# Altium PCB ETRX_Shield_gran.PcbDoc (part 1 of 2)
Units mm, origin at the board's own origin, x right, y up, seen from the top; angles counter-clockwise.
Board outline 80 x 60 mm, 4 copper layers (Top Layer, GND, PWR, Bottom Layer), stack 1.506 mm thick; 134 components, 122 nets, 503 pads, 34 vias.
Unrouted connection lines stored in the file: 347.
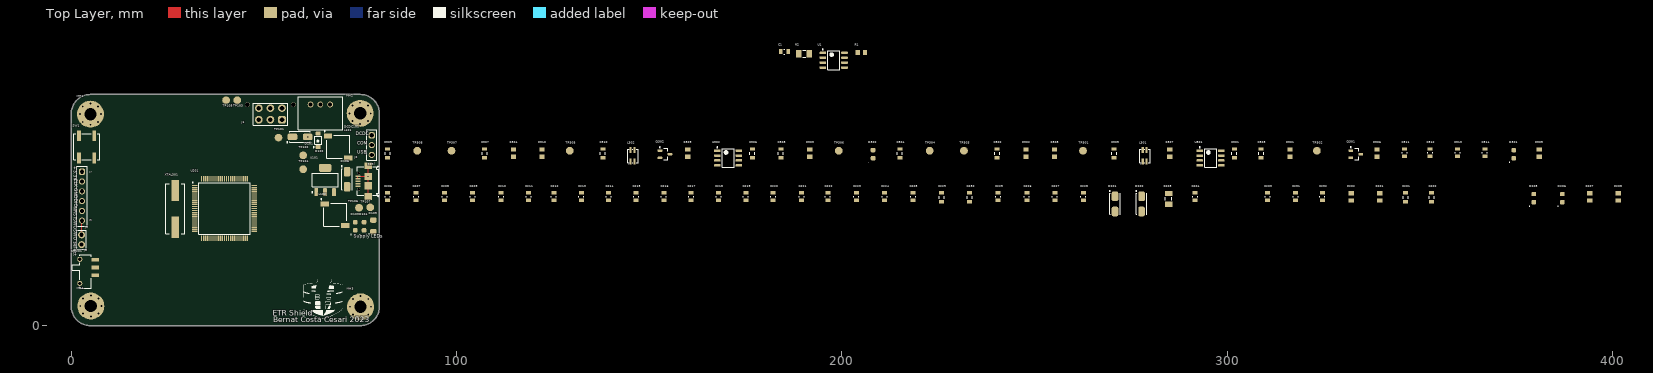
[diagram p0: Top Layer view]
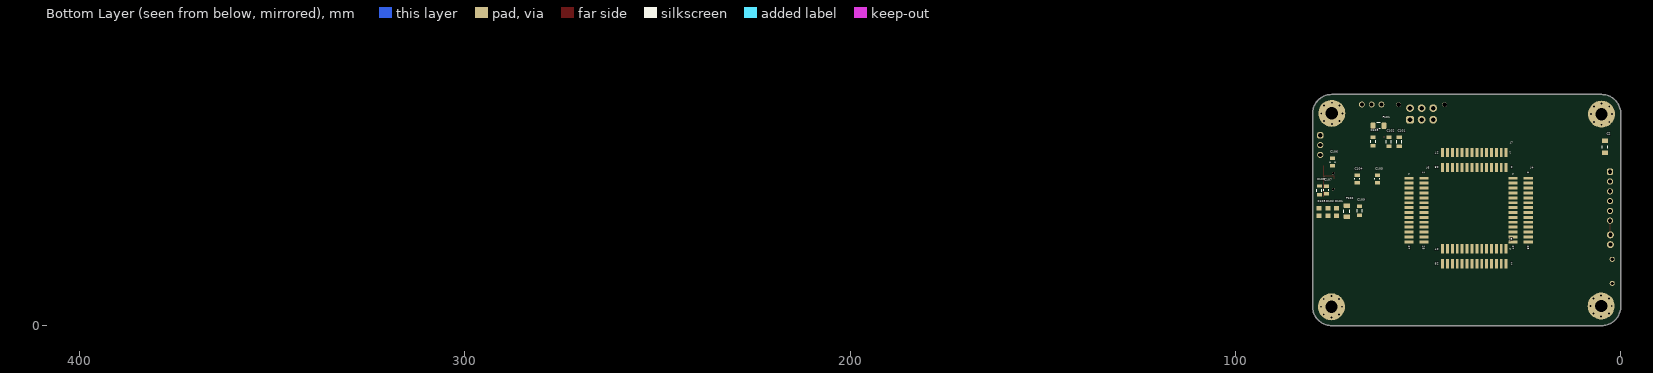
[diagram p1: Bottom Layer view, seen from below]

## Layer stack, top to bottom
Top Solder: solder mask 0.01, Solder Resist, Dk 3.5
Top Layer: signal copper 0.035
Dielectric 2: prepreg 0.1, PP-006, Dk 4.1
GND: signal copper 0.018
Dielectric 4: prepreg 0.1, PP-006, Dk 4.1
Dielectric 1: dielectric 1, FR-4, Dk 4.8
Dielectric 5: prepreg 0.1, PP-006, Dk 4.1
PWR: signal copper 0.018
Dielectric 3: prepreg 0.1, PP-006, Dk 4.1
Bottom Layer: signal copper 0.035
Bottom Solder: solder mask 0.01, Solder Resist, Dk 3.5

## Board outline
5,0 cw(c5,5) 0,5 0,55 cw(c5,55) 5,60 75,60 cw(c75,55) 80,55 80,5 cw(c75,5) 75,0

## Design rules (kind name [scope] priority, off if disabled: settings)
Clearance [All] p1: gap=0.2 ignorepadtopadclearanceinfootprint=FALSE
DiffPairsRouting [All] p1: maxlimit=0.254 minlimit=0.254 mostfreqgap=0.254 toplayer_minwidth=0.381 toplayer_maxwidth=0.381 toplayer_prefwidth=0.381 midlayer1_minwidth=0.381 midlayer1_maxwidth=0.381 midlayer1_prefwidth=0.381 midlayer2_minwidth=0.381 midlayer2_maxwidth=0.381 midlayer2_prefwidth=0.381 bottomlayer_minwidth=0.381 bottomlayer_maxwidth=0.381 bottomlayer_prefwidth=0.381 maxuncoupledlength=12.7
HoleSize [All] p1: absolutevalues=TRUE maxlimit=3 minlimit=0.2 maxpercent=80.000 minpercent=20.000
HoleToHoleClearance [All] p1: gap=0.2 allowstackedmicrovias=TRUE
MinimumSolderMaskSliver [All] p1: minsoldermaskwidth=0.2
PlaneClearance [All] p1: clearance=0.5
PlaneConnect [All] p1: planeconnectstyle=Direct reliefexpansion=0.508 reliefentries=4 reliefconductorwidth=0.254 reliefairgap=0.254
PolygonConnect [All] p1: connectstyle=Direct reliefconductorwidth=0.254 reliefentries=4 polygonreliefangle="90 Angle" airgapwidth=0.254
RoutingVias [All] p1: holewidth=0.2 width=0.3 viastyle="Through Hole" minholewidth=0.2 minwidth=0.3 maxholewidth=1.8 maxwidth=2
SilkToSilkClearance [All] p1: silktosilkclearance=0.2
SilkToSolderMaskClearance [IsPad] p1: minsilkscreentomaskgap=0.2 clearancetoexposedcopper=TRUE
SolderMaskExpansion [All] p1: expansion=0.1 istentingtop=FALSE
UnRoutedNet [All] p1: checkbadconnections=TRUE
Width [All] p1: maxlimit=1 minlimit=0.2 preferedwidth=0.3 midlayer1_minwidth=0.254 midlayer1_maxwidth=0.254 midlayer1_prefwidth=0.254 midlayer2_minwidth=0.254 midlayer2_maxwidth=0.254 midlayer2_prefwidth=0.254 minimp=50.000000 maximp=50.000000 favimp=50.000000
21 further rules are at their usual default settings.

## Classes and differential pairs
component class ETRX_Shield: C1 C2 J1 J2 J3 J4 J5 J6 J7 J8 MH1 MH2 MH3 MH4 R1 R2 SW1 U1
component class "[3] CAN": C301 C302 C303 C304 C305 C306 C307 C308 C309 C310 C311 C312 C313 C314 D301 D302 L301 L302 Q301 Q302 R301 R302 R303 R304 R305 R306 R307 R308 R309 R310 TP301 TP302 TP303 TP304 TP305 TP306 TP307 TP308 U301 U302
component class "[2] MCU": C201 C202 C203 C204 C205 C206 C207 C208 C209 C210 C211 C212 C213 C214 C215 C216 C217 C218 C219 C220 C221 C222 C223 C224 C225 C226 C227 C228 C229 C230 C231 C232 D201 D202 D205 D206 R201 R202 R203 R207 R208 SW201 U201 XTAL301
component class "[1] Supply": C101 C102 C103 C104 C105 C106 C107 C108 C109 D101 D102 D103 D104 D105 D106 DCDC101 F101 F102 J101 L101 L102 R101 R102 R103 TP101 TP102 TP103 TP104 TP105 TP106 TP107 U101
differential pair USB_OTG: +USB_OTG_H -USB_OTG_L
differential pair CAN2: +CAN2_H -CAN2_L
differential pair CAN1: +CAN1_H -CAN1_L

## Components (designator, comment, footprint, x,y, rotation, side; value= is the part's Value field where it differs from the comment)
C1 "885012207098" C0805FNPC-R 185.1,71.1 r0 top
C2 "885012208058" C1206FNPC-RW 4.1,46.4 r90 bottom
C101 "10uF" C0805FNPC-W 57.5,47.75 r90 bottom
C102 "10uF" C0805FNPC-W 60.2,47.75 r90 bottom
C103 "10uF" C0805FNPC-W 64.3,47.8 r90 bottom
C104 "885012107014" C0805FNPC-R 68.4,38.1 r90 bottom
C105 "885012107014" C0805FNPC-R 63.2,38.1 r90 bottom
C106 "885012207098" C0805FNPC-R 74.8,42.45 r270 bottom
C107 "885012207103" C0805FNPC-R 76.4,35.2 r270 bottom
C108 "10uF" C0805FNPC-W 78.2,35.1 r270 bottom
C109 "10uF" C0805FNPC-W 67.8,29.8 r90 bottom
C201 "2.2uF" C0805FNPC-W 346.299,33.3 r90 top
C202 "2.2uF" C0805FNPC-W 353.099,33.3 r90 top
C203 "885012007052" C0805FNPC-R 310.499,33.5 r90 top
C204 "885012007052" C0805FNPC-R 291.699,33.5 r90 top
C205 "885012207098" C0805FNPC-R 218.5,33.5 r90 top
C206 "885012207098" C0805FNPC-R 82.1,33.5 r90 top
C207 "885012207098" C0805FNPC-R 89.5,33.5 r90 top
C208 "885012207098" C0805FNPC-R 96.9,33.5 r90 top
C209 "885012207098" C0805FNPC-R 104.2,33.5 r90 top
C210 "885012207098" C0805FNPC-R 111.6,33.5 r90 top
C211 "885012207098" C0805FNPC-R 118.7,33.5 r90 top
C212 "885012207098" C0805FNPC-R 125.3,33.5 r90 top
C213 "885012207098" C0805FNPC-R 132.4,33.5 r90 top
C214 "885012207098" C0805FNPC-R 139.5,33.5 r90 top
C215 "885012207098" C0805FNPC-R 146.6,33.5 r90 top
C216 "885012207098" C0805FNPC-R 153.8,33.5 r90 top
C217 "885012207098" C0805FNPC-R 160.9,33.5 r90 top
C218 "885012207098" C0805FNPC-R 168,33.5 r90 top
C219 "885012207098" C0805FNPC-R 175.1,33.5 r90 top
C220 "885012207098" C0805FNPC-R 182.2,33.5 r90 top
C221 "885012207098" C0805FNPC-R 189.6,33.5 r90 top
C222 "885012207098" C0805FNPC-R 196.4,33.5 r90 top
C223 "885012207098" C0805FNPC-R 203.8,33.5 r90 top
C224 "885012207098" C0805FNPC-R 211.1,33.5 r90 top
C225 "885012207103" C0805FNPC-R 240.6,33.5 r90 top
C226 "885012207098" C0805FNPC-R 248,33.5 r90 top
C227 "885012207103" C0805FNPC-R 255.299,33.5 r90 top
C228 "885012207098" C0805FNPC-R 262.699,33.5 r90 top
C229 "2.2uF" C0805FNPC-W 225.9,33.3 r90 top
C230 "2.2uF" C0805FNPC-W 233.2,33.3 r90 top
C231 "885012207098" C0805FNPC-R 317.799,33.5 r90 top
C232 "885012207103" C0805FNPC-R 324.699,33.5 r90 top
C301 "885012007057" C0805FNPC-W 301.899,44.7 r90 top
C302 "885012007057" C0805FNPC-W 240.3,44.7 r90 top
C303 "885012007057" C0805FNPC-W 308.799,44.7 r90 top
C304 "885012007057" C0805FNPC-W 215.1,44.7 r90 top
C305 "885012007057" C0805FNPC-W 270.699,44.7 r90 top
C306 "885012007057" C0805FNPC-W 176.8,44.7 r90 top
C307 "885012007057" C0805FNPC-W 107.3,44.7 r90 top
C308 "885012007057" C0805FNPC-W 184.2,44.7 r90 top
C309 "885012007057" C0805FNPC-W 82.1,44.7 r90 top
C310 "885012007057" C0805FNPC-W 138,44.7 r90 top
C311 "885012207098" C0805FNPC-R 346.099,44.9 r90 top
C312 "885012207098" C0805FNPC-R 352.699,44.9 r90 top
C313 "885012207098" C0805FNPC-R 359.799,44.9 r90 top
C314 "885012207098" C0805FNPC-R 366.899,44.9 r90 top
D101 "824501261" DTVS-DO-214AC 59.4,49 r180 top
D102 "MBR0530" DSC-SOD123 64.1,48.1 r90 top
D103 "150080GS75000" LED_0805_WE 73.7,25.8 r90 top
D104 "150080GS75000" LED_0805_WE 76,25.8 r90 top
D105 "150120BS75000" LED_1206_WE 78.4,25.9 r90 top
D106 "824501131" DTVS-DO-214AC 71.6,38 r90 top
D201 "824501600" DTVS-DO-214AC 270.899,31.6 r90 top
D202 "824501600" DTVS-DO-214AC 277.799,31.6 r90 top
D205 "150080RS75000" LED_0805_WE 379.599,33.1 r90 top
D206 "150080RS75000" LED_0805_WE 386.999,33.1 r90 top
D301 "150080YS75000" LED_0805_WE 374.399,44.5 r90 top
D302 "150080YS75000" LED_0805_WE 208.1,44.5 r90 top
DCDC101 "173010542" DCDC_Magi3c 64.66,57.4 r0 top
F101 "0437001.WRA" Fuse_1206 62.875,51.9 r180 bottom
F102 "0437001.WRA" Fuse_1206 71.1,29.7 r90 bottom
J1 "Molex Micro Fit 2x3" J_MicroFit_2x3_V 51.7,55.4 r0 top
J2 "629105136821" 629105136821 77.1,37.5 r90 top
J3 "6 pin header" 61300611121 2.8,33.59 r270 top
J4 "62132821021" 62132821021 26,30 r270 bottom locked
J5 "62132821021" 62132821021 38,18 r0 bottom locked
J6 "62132821021" 62132821021 53,30 r270 bottom locked
J7 "62132821021" 62132821021 38,43 r0 bottom locked
J8 "61300211121" J_Pinheader_1x2 2.7,22.3 r90 top
J101 "3 pin header" J_PINHEADER_1x3 78,46.86 r270 top
L101 "47uH" L_47u-490mA_CF 69.3,46.4 r0 top
L102 "47uH" L_47u-490mA_CF 68.5,28.8 r0 top
L301 "DLW32SH510XF2" "CMC-51uH Choke" 278.599,44.1 r90 top
L302 "DLW32SH510XF2" "CMC-51uH Choke" 145.7,44.1 r90 top
MH1 "Mounting_Hole_M3" Mounting_Hole_M3 5,54.9 r0 top
MH2 "Mounting_Hole_M3" Mounting_Hole_M3 75,55.1 r0 top
MH3 "Mounting_Hole_M3" Mounting_Hole_M3 75.1,4.9 r0 top
MH4 "Mounting_Hole_M3" Mounting_Hole_M3 5.1,5.1 r0 top
Q301 "BC817-25LT1G" TRT-NPN-0.5/45-SOT23 333.399,44.5 r0 top
Q302 "BC817-25LT1G" TRT-NPN-0.5/45-SOT23 154.1,44.5 r0 top
R1 "549kR" R0805FTK 205.1,70.9 r0 top
R2 "CR1206AFX-6802EAS" R1206FTK-W 190.2,70.6 r0 top
R101 "CR0805-FX-4700GLF" R0805FTK 73.8,29.5 r270 bottom
R102 "CR0805-FX-1000ELF" R0805FTK 76,29.5 r270 bottom
R103 "CR0805-FX-4700GLF" R0805FTK 78.3,29.5 r90 bottom
R201 "620kR" R0805FTK 339.599,33.4 r90 top
R202 "430kR" R0805FTK 332.199,33.4 r90 top
R203 "CRCW12061K60FKEA" R1206FTK-W 284.799,32.9 r90 top
R207 "CR0805-FX-1000ELF" R0805FTK 394.099,33.4 r90 top
R208 "CR0805-FX-1000ELF" R0805FTK 401.499,33.4 r90 top
R301 "R60-0805FTN" R0805FTK 316.299,44.8 r90 top value=60R
R302 "R60-0805FTN" R0805FTK 247.8,44.8 r90 top value=60R
R303 "R60-0805FTN" R0805FTK 191.7,44.8 r90 top value=60R
R304 "R60-0805FTN" R0805FTK 114.8,44.8 r90 top value=60R
R305 "CR0805-FX-4700GLF" R0805FTK 380.999,44.8 r90 top
R306 "47k" R0805FTK 338.899,44.8 r90 top
R307 "22kR" R0805FTK 285.099,44.8 r90 top
R308 "CR0805-FX-4700GLF" R0805FTK 255.199,44.8 r90 top
R309 "47k" R0805FTK 160,44.8 r90 top
R310 "22kR" R0805FTK 122.2,44.8 r90 top
SW1 "430773034825" WS-TASV_L6W6H3.4_4307x30348xx 4,46.4 r270 top
SW201 "450405020524" 450405020524 3.726,14.1 r270 top
TP101 "TestPoint" TestPoint 53.8,48.8 r90 top
TP102 "TestPoint" TestPoint 60.2,44.2 r90 top
TP103 "TestPoint" TestPoint 43.1,58.5 r90 top
TP104 "TestPoint" TestPoint 60.2,40.6 r90 top
TP105 "TestPoint" TestPoint 40.2,58.5 r90 top
TP106 "TestPoint" TestPoint 74.7,30.6 r90 top
TP107 "TestPoint" TestPoint 77.6,30.7 r90 top
TP301 "TestPoint" TestPoint 262.599,45.4 r90 top
TP302 "TestPoint" TestPoint 323.299,45.4 r90 top
TP303 "TestPoint" TestPoint 231.7,45.4 r90 top
TP304 "TestPoint" TestPoint 222.8,45.4 r90 top
TP305 "TestPoint" TestPoint 129.4,45.4 r90 top
TP306 "TestPoint" TestPoint 199.2,45.4 r90 top
TP307 "TestPoint" TestPoint 98.7,45.4 r90 top
TP308 "TestPoint" TestPoint 89.8,45.4 r90 top
U1 "24AA024H-I/SN" "SOIC, 8-Leads 1,27mm" 197.9,68.9 r0 top
U101 "LM1117IMP-3.3/NOPB" LDO_10V-0.8/3V3-SOT223 65.9,37.8 r90 top
U201 "STM32F777VIT6" QFP50P1600X1600X160-100N 39.8,30.4 r0 top locked
U301 "MCP2551 I/SN" "SOIC, 8-Leads 1,27mm" 295.699,43.5 r0 top
U302 "MCP2551 I/SN" "SOIC, 8-Leads 1,27mm" 170.5,43.5 r0 top
XTAL301 "830028710" XTAL20M_SMD 27,30.3 r90 top

## Footprints (in the part's own frame and the unit in brackets; to place one, negate y for a bottom-side part, rotate by r counter-clockwise, add the part's x,y. Pads: shape width x height; smd on the part's side, far side on the other; paste and mask are expansions set on the pad)
61300611121 [mm] "Pin Header, pitch 2.54 mm, THT, Vertical, single row, 6p"
  rrect50% 1.6x1.6 hole 1.1: 1(-6.35,0)
  round 1.6 hole 1.1: 2(-3.81,0) 3(-1.27,0) 4(1.27,0) 5(3.81,0) 6(6.35,0)
  silkscreen extent -7.77,-1.35 7.77,1.35, body extent -7.62,-1.27 7.62,1.27, height 8.57
62132821021 [mm] "Pin Header, pitch 1.27 mm, SMD, Vertical, dual row, 28p"
  rect 0.75x2.4 smd: 1(-8.255,-1.95) 2(-8.255,1.95) 3(-6.985,-1.95) 4(-6.985,1.95) 5(-5.715,-1.95) 6(-5.715,1.95) 7(-4.445,-1.95) 8(-4.445,1.95) 9(-3.175,-1.95) 10(-3.175,1.95) 11(-1.905,-1.95) 12(-1.905,1.95) 13(-0.635,-1.95) 14(-0.635,1.95) 15(0.635,-1.95) 16(0.635,1.95) 17(1.905,-1.95) 18(1.905,1.95) 19(3.175,-1.95) 20(3.175,1.95) 21(4.445,-1.95) 22(4.445,1.95) 23(5.715,-1.95) 24(5.715,1.95) 25(6.985,-1.95) 26(6.985,1.95) 27(8.255,-1.95) 28(8.255,1.95)
  body extent -8.89,-2.55 8.89,2.55, height 5.9
450405020524 [mm] "SMT Mini Slide Switch, Same side connection"
  rect 1x1.9 smd: COM(1,2.55) L1(-3,2.55) L2(-1,2.55)
  round 1.3 hole 0.8: MH1(-3.125,-1.5) MH2(3.125,-1.5)
  silkscreen extent -4.35,-3.5 4.35,1.5, body extent -4.45,-3.5 4.45,3.05, height 1.98
629105136821 [mm] "Micro USB 2.0 SMT Type B Horizontal 5 Contacts"
  rect 0.4x1.35 smd: 1(-1.3,2.675) 2(-0.65,2.675) 3(0,2.675) 4(0.65,2.675) 5(1.3,2.675)
  round 0.7 hole 0.7 unplated: MH1(-2.075,2.45) MH2(2.075,2.45)
  rect 1.8x1.9 smd: Shell(-4,0) Shell(4,0)
  rect 1.9x1.9 smd: Shell(-1.2,0) Shell(1.2,0)
  silkscreen extent -4,-2.75 4,2.85, body extent -4,-2.73 4,3.17, height 2.69
C0805FNPC-R [mm]
  rect 0.9x1.3 smd: 1(-0.95,0) 2(0.95,0)
  silkscreen extent -0.15,-0.65 0.15,0.65, body extent -1.03,-0.63 0.97,0.63, height 0.96
C0805FNPC-W [mm]
  rect 0.9x1.3 smd: 1(-1.15,0) 2(1.15,0)
  silkscreen extent -0.35,-0.65 0.35,0.65, body extent -1,-0.63 1,0.63, height 0.96
C1206FNPC-RW [mm] "Chip Capacitor, 2-Leads, Body 3,20x1,60mm, IPC Medium Density"
  rect 1.2x1.6 smd: 1(-1.55,0) 2(1.55,0)
  silkscreen extent -0.35,-0.7 0.35,0.7, body extent -1.59,-0.77 1.61,0.83, height 0.91
"CMC-51uH Choke" [mm]
  rect 1.5x0.55 smd: 1(-1.525,0.5) 2(1.525,0.5) 3(1.525,-0.5) 4(-1.525,-0.5)
  silkscreen extent -2.25,-1.5 1.7,1.3
DCDC_Magi3c [mm]
  round 1.5 hole 1: 1(2.54,0) 2(0,0) 3(-2.54,0)
  silkscreen extent -5.75,-6.5 5.77,2, body extent -5.8,-6.5 5.8,2, height 10.2
DSC-SOD123 [mm] "SOIC, 2-Leads, Body 1,60x2,69mm, Pitch 1,27mm, IPC Low Density"
  rrect50% 1.1x1.3 smd: A(1.75,0) K(-1.75,0)
  silkscreen extent -1.87,-0.9 1,1.32, body extent -1.86,-0.8 1.86,0.8, height 1.36
DTVS-DO-214AC [mm] "Molded Diode, 2-Leads, Body 5,11x2,67mm, IPC Medium Density"
  rrect50% 2.5x1.7 smd: 1(-1.975,0) 2(1.975,0)
  silkscreen extent -2.7,-1.4 3.47,1.52, body extent -2.56,-1.34 2.56,1.34, height 2.5
Fuse_1206 [mm] "Chip Resistor, 2-Leads, Body 3,20x1,58mm, IPC Medium Density"
  rrect50% 1.25x1.75 smd: 1(-1.425,0) 2(1.425,0)
  silkscreen extent -0.4,-0.77 0.4,0.77, body extent -1.6,-0.79 1.6,0.79, height 0.86
J_MicroFit_2x3_V [mm]
  rrect50% 2x2 hole 1.2: 1(3,-1.944)
  round 2 hole 1.2: 2(0,-1.944) 3(-3,-1.944) 4(3,1.055) 5(0,1.055) 6(-3,1.055)
  round 1.2 hole 1.2: 7(-5.969,1.944) 7(5.969,1.944)
  silkscreen extent -4.5,-3.34 4.5,2.37, body extent -6.57,-4.41 6.58,4.36, height 9.92
J_Pinheader_1x2 [mm]
  round 1.8 hole 1.1: 1(-1.27,0) 2(1.27,0)
  silkscreen extent -2.52,-1.25 2.48,1.29, body extent -2.54,-1.27 2.54,1.27, height 9.5
J_PINHEADER_1x3 [mm] "Pin Header, pitch 2.54 mm, THT, Vertical, single row, 3p"
  rrect50% 1.6x1.6 hole 1.1: 1(-2.54,0)
  round 1.6 hole 1.1: 2(0,0) 3(2.54,0)
  silkscreen extent -3.96,-1.35 3.96,1.35, body extent -3.81,-1.27 3.81,1.27, height 8.57
L_47u-490mA_CF [mm] "Precision Wire Wound Inductor, 2-Leads, Body 5,80x5,80mm, IPC Medium Density"
  rect 2.2x1.3 smd: 1(-2.65,2.825) 2(2.643,-2.832)
  silkscreen extent -3.67,-3 3,4.17, body extent -3,-3 3,3, height 2.5
LDO_10V-0.8/3V3-SOT223 [mm] "SOT223, 4-Leads, Body 6,50x7,00mm (avg), Pitch 2,30mm, IPC Low Density"
  rrect50% 2.1x1 smd: 1(-3.15,2.3) 2(-3.15,0) 3(-3.15,-2.3)
  rrect50% 2.1x3.3 smd: 4(3.15,0)
  silkscreen extent -3.27,-3.35 1.8,3.47, body extent -3.5,-3.25 3.5,3.25, height 1.81
LED_0805_WE [mm] "SODFL, 2-Leads, Body 1,60x3,20mm, IPC Medium Density"
  rrect50% 1.1x1.2 smd: A(1.05,0) K(-1.05,0)
  silkscreen extent -2.15,1.05 -2.05,1.15, body extent -1,-0.62 1,0.63, height 0.7
LED_1206_WE [mm] "SODFL, 2-Leads, Body 1,60x3,20mm, IPC Medium Density"
  rrect50% 1.4x1.6 smd: A(1.5,0) K(-1.5,0)
  silkscreen extent -2.15,1.05 -2.05,1.15, body extent -1.6,-0.8 1.6,0.8, height 0.68
Mounting_Hole_M3 [mm]
  round 7 hole 3.2: 1(0,0)
QFP50P1600X1600X160-100N [mm]
  rect 1.475x0.3 smd: 1(-7.738,6) 2(-7.738,5.5) 3(-7.738,5) 4(-7.738,4.5) 5(-7.738,4) 6(-7.738,3.5) 7(-7.738,3) 8(-7.738,2.5) 9(-7.738,2) 10(-7.738,1.5) 11(-7.738,1) 12(-7.738,0.5) 13(-7.738,0) 14(-7.738,-0.5) 15(-7.738,-1) 16(-7.738,-1.5) 17(-7.738,-2) 18(-7.738,-2.5) 19(-7.738,-3) 20(-7.738,-3.5) 21(-7.738,-4) 22(-7.738,-4.5) 23(-7.738,-5) 24(-7.738,-5.5) 25(-7.738,-6) 51(7.738,-6) 52(7.738,-5.5) 53(7.738,-5) 54(7.738,-4.5) 55(7.738,-4) 56(7.738,-3.5) 57(7.738,-3) 58(7.738,-2.5) 59(7.738,-2) 60(7.738,-1.5) 61(7.738,-1) 62(7.738,-0.5) 63(7.738,0) 64(7.738,0.5) 65(7.738,1) 66(7.738,1.5) 67(7.738,2) 68(7.738,2.5) 69(7.738,3) 70(7.738,3.5) 71(7.738,4) 72(7.738,4.5) 73(7.738,5) 74(7.738,5.5) 75(7.738,6)
  rect 0.3x1.475 smd: 26(-6,-7.738) 27(-5.5,-7.738) 28(-5,-7.738) 29(-4.5,-7.738) 30(-4,-7.738) 31(-3.5,-7.738) 32(-3,-7.738) 33(-2.5,-7.738) 34(-2,-7.738) 35(-1.5,-7.738) 36(-1,-7.738) 37(-0.5,-7.738) 38(0,-7.738) 39(0.5,-7.738) 40(1,-7.738) 41(1.5,-7.738) 42(2,-7.738) 43(2.5,-7.738) 44(3,-7.738) 45(3.5,-7.738) 46(4,-7.738) 47(4.5,-7.738) 48(5,-7.738) 49(5.5,-7.738) 50(6,-7.738) 76(6,7.738) 77(5.5,7.738) 78(5,7.738) 79(4.5,7.738) 80(4,7.738) 81(3.5,7.738) 82(3,7.738) 83(2.5,7.738) 84(2,7.738) 85(1.5,7.738) 86(1,7.738) 87(0.5,7.738) 88(0,7.738) 89(-0.5,7.738) 90(-1,7.738) 91(-1.5,7.738) 92(-2,7.738) 93(-2.5,7.738) 94(-3,7.738) 95(-3.5,7.738) 96(-4,7.738) 97(-4.5,7.738) 98(-5,7.738) 99(-5.5,7.738) 100(-6,7.738)
  silkscreen extent -8.35,-6.65 6.65,6.87
R0805FTK [mm] "Chip Resistor, 2-Leads, Body 2,00x1,25mm, IPC Medium Density"
  rect 1.15x1.35 smd: 1(-0.925,0) 2(0.925,0)
  body extent -1,-0.63 1,0.63, height 0.65
R1206FTK-W [mm] "Chip Resistor, 2-Leads, Body 3,15x1,60mm, IPC Medium Density"
  rect 1.4x1.95 smd: 1(-1.4,0) 2(1.4,0)
  silkscreen extent -0.4,-0.87 0.4,0.87, body extent -1.58,-0.8 1.58,0.8, height 0.61
"SOIC, 8-Leads 1,27mm" [mm] "SOIC, 8-Leads, Body 4,90x3,90mm, Pitch 1,27mm, IPC Low Density"
  rrect50% 1.7x0.65 smd: 1(-2.8,1.905) 2(-2.8,0.635) 3(-2.8,-0.635) 4(-2.8,-1.905) 5(2.8,-1.905) 6(2.8,-0.635) 7(2.8,0.635) 8(2.8,1.905)
  silkscreen extent -2.92,-2.45 1.55,2.9, body extent -2.98,-2.43 3.02,2.47, height 1.76
TestPoint [mm]
  round 2 smd: 1(0,0)
TRT-NPN-0.5/45-SOT23 [mm] "SOT23, 3-Leads, Body 2,92x2,37mm, Pitch 0,95mm, IPC Low Density"
  rrect50% 1.2x0.65 smd: B(-1.3,0.95) C(1.3,0) E(-1.3,-0.95)
  silkscreen extent -1.42,-1.5 0.7,1.95, body extent -1.18,-1.46 1.19,1.46, height 1.12
WS-TASV_L6W6H3.4_4307x30348xx [mm] "SMD Tact Switch, body 6x6mm"
  rect 2.75x1 smd: A1(-2.875,2) A2(2.875,2) B1(-2.875,-2) B2(2.875,-2)
  silkscreen extent -3.35,-3.35 3.35,3.35, body extent -3.4,-3.1 3.4,3.1, height 3.4
XTAL20M_SMD [mm]
  rect 5.5x2 smd: 1(-4.75,0) 2(4.75,0)
  silkscreen extent -6.5,-2.45 6.5,2.45, body extent -6.65,-2.47 6.65,2.48, height 4.3

## Part data
C1 C106 C205 C206 C207 C208 C209 C210 C211 C212 C213 C214 C215 C216 C217 C218 C219 C220 C221 C222 C223 C224 C226 C228 C231 C311 C312 C313 C314: library part C100n-50V-0805FNPC-X7R, "Cap, 0.1ΜF, 50V, 10%, X7R, 0805", Capacitance=100nF, Case Code (Imperial)=0805, Case Code (Metric)=2012, Dielectric=X7R, Manufacturer 1="Wurth Electronics", Max Operating Temperature=125°C, Min Operating Temperature=-55°C, Supplier Part Number 1=1813493, Tolerance=10%, Voltage Rating=50V, .Creator=DR, Case/Package=0805, Category="Ceramic Capacitors", ComponentLink1Description=http://www.farnell.com/datasheets/1958498.pdf?src-supplier=Farnell, ComponentLink1URL=http://www.farnell.com/datasheets/1958498.pdf?src-supplier=Farnell, ComponentLink2Description=http://www.farnell.com/datasheets/1958498.pdf?src-supplier=Element14, ComponentLink2URL=http://www.farnell.com/datasheets/1958498.pdf?src-supplier=Element14, ComponentLink3Description=https://katalog.we-online.de/pbs/datasheet/885012207098.pdf?src-supplier=Digi-Key, ComponentLink3URL=https://katalog.we-online.de/pbs/datasheet/885012207098.pdf?src-supplier=Digi-Key, ComponentLink4Description=http://www.farnell.com/datasheets/1958498.pdf?src-supplier=Newark, ComponentLink4URL=http://www.farnell.com/datasheets/1958498.pdf?src-supplier=Newark, Length=0.079inch, Manufacturer Part Number 1=885012207098, Mount="Surface Mount", Packaging="Cut Tape", Pricing 1="100=0,10200, 500=0,07100, 2000=0,06100 (GBP)", REACH SVHC=Unknown, RoHS=Yes, RoHS Compliant=Yes, Stock 1=8000, Supplier 1=RSComponents, Thickness=0.035inch, Voltage Rating (DC)=50V, Width=0.049inch
C2: library part C100n-25V-1206FNPC-X7R, "Cap Cer 0.1UF 25V X7R 1206", Capacitance=100nF, Case Code (Imperial)=1206, Case Code (Metric)=3216, Manufacturer="Wurth Electronics", Max Operating Temperature=125°C, Min Operating Temperature=-55°C, Supplier Part Number 1=732-8109-1-ND, Tolerance=10%, Voltage Rating=25V, .Creator=DO, Case/Package=1206, Category=Capacitor, ComponentLink1Description=Datasheet, ComponentLink1URL=https://www.we-online.com/catalog/datasheet/885012208058.pdf, ComponentLink2Description="Where buy it", ComponentLink2URL=https://www.we-online.com/catalog/en/WCAP-CSGP-25VDC#885012208058, ComponentLink3Description=https://katalog.we-online.de/pbs/datasheet/885012208058.pdf?src-supplier=Digi-Key, ComponentLink3URL=https://katalog.we-online.de/pbs/datasheet/885012208058.pdf?src-supplier=Digi-Key, Length=0.126inch, Manufacturer part number=885012208058, Mount="Surface Mount", Packaging="Tape and Reel", Pricing 1="1=0,11000, 10=0,10100, 100=0,09100, 500=0,08000 (USD)", RoHS=Yes, RoHS Compliant=Yes, Stock 1=4375, Supplier 1=Digi-Key, Thickness=0.035inch, Width=0.063inch
C101 C102 C103 C108 C109: library part C10uF-50V-0805FNPC
C104 C105: library part C10u-16V-0805FNPC-X5R, "Multilayer Ceramic Capacitor, Wcap-Csgp Series, 10 F, 20%, X5R, 16 V, 0805 [2012 Metric] Rohs Compliant: Yes", Capacitance=10uF, Case Code (Imperial)=0805, Case Code (Metric)=2012, Dielectric=X5R, Manufacturer 1="Wurth Electronics", Max Operating Temperature=85°C, Min Operating Temperature=-55°C, Supplier Part Number 1=1813526, Tolerance=20%, Voltage Rating=16V, .Creator=DR, Case/Package=0805, Category="Ceramic Capacitors", ComponentLink1Description=http://www.farnell.com/datasheets/1958454.pdf?src-supplier=Farnell, ComponentLink1URL=http://www.farnell.com/datasheets/1958454.pdf?src-supplier=Farnell, ComponentLink2Description=http://www.farnell.com/datasheets/1958454.pdf?src-supplier=Element14, ComponentLink2URL=http://www.farnell.com/datasheets/1958454.pdf?src-supplier=Element14, ComponentLink3Description=https://katalog.we-online.de/pbs/datasheet/885012107014.pdf?src-supplier=Digi-Key, ComponentLink3URL=https://katalog.we-online.de/pbs/datasheet/885012107014.pdf?src-supplier=Digi-Key, ComponentLink4Description=http://www.farnell.com/datasheets/1958454.pdf?src-supplier=Newark, ComponentLink4URL=http://www.farnell.com/datasheets/1958454.pdf?src-supplier=Newark, Length=0.079inch, Manufacturer Part Number 1=885012107014, Mount="Surface Mount", Packaging="Cut Tape", Pricing 1="50=0,21000, 250=0,20200, 500=0,19100, 1000=0,17400, 2500=0,14700 (GBP)", REACH SVHC=Unknown, RoHS=Yes, RoHS Compliant=Yes, Stock 1=81550, Supplier 1=RSComponents, Thickness=0.057inch, Voltage Rating (DC)=16V, Width=0.049inch
C107 C225 C227 C232: library part C1u-50V-0805FNPC-X7R, "Multilayer Ceramic Capacitor, Wcap-Csgp Series, 1 F, 10%, X7R, 50 V, 0805 [2012 Metric] Rohs Compliant: Yes", Capacitance=1uF, Case Code (Imperial)=0805, Case Code (Metric)=2012, Dielectric=X7R, Manufacturer 1="Wurth Electronics", Max Operating Temperature=85°C, Min Operating Temperature=-55°C, Supplier Part Number 1=1813523, Tolerance=10%, Voltage Rating=50V, .Creator=GP, Case/Package=0805, Category="Ceramic Capacitors", ComponentLink1Description=http://www.farnell.com/datasheets/1958501.pdf?src-supplier=Farnell, ComponentLink1URL=http://www.farnell.com/datasheets/1958501.pdf?src-supplier=Farnell, ComponentLink2Description=http://www.farnell.com/datasheets/1958501.pdf?src-supplier=Element14, ComponentLink2URL=http://www.farnell.com/datasheets/1958501.pdf?src-supplier=Element14, ComponentLink3Description=https://katalog.we-online.de/pbs/datasheet/885012107003.pdf?src-supplier=Digi-Key, ComponentLink3URL=https://katalog.we-online.de/pbs/datasheet/885012107003.pdf?src-supplier=Digi-Key, ComponentLink4Description=http://www.farnell.com/datasheets/1958501.pdf?src-supplier=Newark, ComponentLink4URL=http://www.farnell.com/datasheets/1958501.pdf?src-supplier=Newark, Length=0.079inch, Manufacturer Part Number 1=885012207103, Mount="Surface Mount", Packaging="Cut Tape", Pricing 1="50=0,27200, 250=0,25300, 500=0,22800, 1250=0,20100, 2500=0,17100 (GBP)", REACH SVHC=Unknown, RoHS=Yes, RoHS Compliant=Yes, Stock 1=5100, Supplier 1=RSComponents, Thickness=0.053inch, Voltage Rating (DC)=50V, Width=0.049inch
C201 C202 C229 C230: library part C2.2u-16V-0805FTK
C203 C204: library part C15p-50V-0805FNPC-NP0, "Cap, 15PF, 50V, 5%, C0G/NP0, 0805", Capacitance=15pF, Case Code (Imperial)=0805, Case Code (Metric)=2012, Manufacturer 1="Wurth Electronics", Max Operating Temperature=125°C, Min Operating Temperature=-55°C, Supplier Part Number 1=15AC9316, Tolerance=5%, Voltage Rating=50V, .Creator=DR, Case/Package=0805, Category="Ceramic Capacitors", ComponentLink1Description=http://www.farnell.com/datasheets/2031702.pdf?src-supplier=Farnell, ComponentLink1URL=http://www.farnell.com/datasheets/2031702.pdf?src-supplier=Farnell, ComponentLink2Description=http://katalog.we-online.de/pbs/datasheet/885012007052.pdf?src-supplier=Digi-Key, ComponentLink2URL=http://katalog.we-online.de/pbs/datasheet/885012007052.pdf?src-supplier=Digi-Key, ComponentLink3Description=https://katalog.we-online.de/pbs/datasheet/885012007052.pdf?src-supplier=Digi-Key, ComponentLink3URL=https://katalog.we-online.de/pbs/datasheet/885012007052.pdf?src-supplier=Digi-Key, Length=0.079inch, Manufacturer Part Number 1=885012007052, Mount="Surface Mount", Packaging="Cut Tape", Pricing 1="1=0,10800, 10=0,05200, 25=0,05100, 50=0,04900, 100=0,04800, 250=0,04600, 500=0,04300 (USD)", RoHS=Yes, RoHS Compliant=Yes, Stock 1=815, Supplier 1=Newark, Thickness=0.028inch, Width=0.049inch
C301 C302 C303 C304 C305 C306 C307 C308 C309 C310: library part C100p-50V-0805FNPC-C0G/NP0, "Multilayer Ceramic Capacitor, Wcap-Csgp Series, 100 Pf, 5%, C0G / Np0, 50 V, 0805 [2012 Metric] Rohs Compliant: Yes", Capacitance=100pF, Case Code (Imperial)=0805, Case Code (Metric)=2012, Dielectric=C0G, Manufacturer="Wurth Electronics", Max Operating Temperature=125°C, Min Operating Temperature=-55°C, Supplier Part Number 1=1813930, Tolerance=5%, Voltage Rating=50V, .Creator=DR, Case/Package=0805, Category="Ceramic Capacitors", ComponentLink1Description=http://www.farnell.com/datasheets/1958443.pdf?src-supplier=Farnell, ComponentLink1URL=http://www.farnell.com/datasheets/1958443.pdf?src-supplier=Farnell, ComponentLink2Description=https://katalog.we-online.de/pbs/datasheet/885012007057.pdf?src-supplier=Digi-Key, ComponentLink2URL=https://katalog.we-online.de/pbs/datasheet/885012007057.pdf?src-supplier=Digi-Key, ComponentLink3Description=http://www.farnell.com/datasheets/1958443.pdf?src-supplier=Element14, ComponentLink3URL=http://www.farnell.com/datasheets/1958443.pdf?src-supplier=Element14, ComponentLink4Description=http://www.farnell.com/datasheets/1958443.pdf?src-supplier=Newark, ComponentLink4URL=http://www.farnell.com/datasheets/1958443.pdf?src-supplier=Newark, ComponentLink5Description="Where buy it", ComponentLink5URL=https://www.we-online.com/catalog/en/WCAP-CSGP-50VDC#885012007057, Length=0.079inch, Manufacturer part number=885012007057, Mount="Surface Mount", Packaging="Cut Tape", Pricing 1="4000=0,03900, 12000=0,03800 (USD)", REACH SVHC=Unknown, RoHS=Yes, RoHS Compliant=Yes, Stock 1=1, Supplier 1=RSComponents, Thickness=0.035inch, Voltage Rating (DC)=50V, Width=0.049inch
D101: library part DTVS-26V-DO-214AC, "TVS diode [Würth Elektronik] 824501261 TVS diode", Clamping Voltage=42.1V, Manufacturer="Wurth Electronics", Max Breakdown Voltage=30.4V, Max Operating Temperature=150°C, Min Operating Temperature=-65°C, Peak Pulse Current=9.5A, Peak Pulse Power=400W, Power Line Protection=No, Resistor Type=Zener, Reverse Standoff Voltage=26V, Supplier Part Number 1=9217305, .Creator=DO, Category="TVS Diodes", ComponentLink1Description=http://www.farnell.com/datasheets/2036389.pdf?src-supplier=Farnell, ComponentLink1URL=http://www.farnell.com/datasheets/2036389.pdf?src-supplier=Farnell, ComponentLink2Description=http://www.farnell.com/datasheets/2036389.pdf?src-supplier=Element14, ComponentLink2URL=http://www.farnell.com/datasheets/2036389.pdf?src-supplier=Element14, ComponentLink3Description=https://katalog.we-online.de/pbs/datasheet/824501261.pdf?src-supplier=Digi-Key, ComponentLink3URL=https://katalog.we-online.de/pbs/datasheet/824501261.pdf?src-supplier=Digi-Key, ComponentLink4Description="Where buy it", ComponentLink4URL=https://www.we-online.com/catalog/en/WE-TVSP?sq=824501261#824501261, Manufacturer part number=824501261, Min Breakdown Voltage=30.4V, Mount="Surface Mount", Number of Bidirectional Channels=1, Number of Pins=2, Packaging="Cut Tape", Polarity=Bidirectional, Pricing 1="50=0,29400, 250=0,26100, 500=0,21200, 1000=0,20100, 2000=0,19600 (USD)", REACH SVHC=Unknown, RoHS=Yes, RoHS Compliant=Yes, Stock 1=1, Supplier 1=RSComponents
D102: library part DSC-0.5/30-SOD123, "VR=30V IF=500mA 30pF P=410mW", Average Rectified Current=500mA, Forward Voltage=430mV, Max Forward Surge Current (Ifsm)=5.5A, Max Repetitive Reverse Voltage (Vrrm)=30V, Max Reverse Current=130uA, Package Quantity=1, Supplier Part Number 1=15R3453, .Creator=GP, Category=Diode, ComponentLink1Description=Datasheet, ComponentLink2Description="Where buy it", ComponentLink3Description=https://datasheet.ciiva.com/30479/0900766b810e2512-30479401.pdf?src-supplier=RSComponents, ComponentLink3URL=https://datasheet.ciiva.com/30479/0900766b810e2512-30479401.pdf?src-supplier=RSComponents, ComponentLink4Description=https://datasheet.ciiva.com/34301/974753-34301826.pdf?src-supplier=Jameco, ComponentLink4URL=https://datasheet.ciiva.com/34301/974753-34301826.pdf?src-supplier=Jameco, ComponentLink5Description=https://datasheet.ciiva.com/910/mbr0530-910516.pdf?src-supplier=Digi-Key, ComponentLink5URL=https://datasheet.ciiva.com/910/mbr0530-910516.pdf?src-supplier=Digi-Key, ComponentLink6Description=https://datasheet.ciiva.com/25931/mbr0530-25931989.pdf?src-supplier=Avnet+Europe, ComponentLink6URL=https://datasheet.ciiva.com/25931/mbr0530-25931989.pdf?src-supplier=Avnet+Europe, ComponentLink7Description=https://datasheet.ciiva.com/8300/mbr0530-8300905.pdf?src-supplier=Avnet, ComponentLink7URL=https://datasheet.ciiva.com/8300/mbr0530-8300905.pdf?src-supplier=Avnet, ComponentLink8Description=https://datasheet.ciiva.com/17318/mbr0530-17318568.pdf?src-supplier=Future+Electronics, ComponentLink8URL=https://datasheet.ciiva.com/17318/mbr0530-17318568.pdf?src-supplier=Future+Electronics, ComponentLink9Description=https://datasheet.ciiva.com/15144/getdatasheetpartid-86760-15144598.pdf?src-supplier=Verical, ComponentLink9URL=https://datasheet.ciiva.com/15144/getdatasheetpartid-86760-15144598.pdf?src-supplier=Verical, ComponentLink10Description=https://datasheet.ciiva.com/910/mbr0530-910518.pdf?src-supplier=Digi-Key, ComponentLink10URL=https://datasheet.ciiva.com/910/mbr0530-910518.pdf?src-supplier=Digi-Key, Contact Plating=Tin,Matte, Current Rating=500mA, Element Configuration=Single, Forward Current=500mA, Height=1.03mm, Lead Free="Lead Free", Length=2.7mm, Max Reverse Leakage Current=130uA, Max Reverse Voltage (DC)=30V, Max Surge Current=5.5A, Mount="Surface Mount", Output Current=500mA, Peak Non-Repetitive Surge Current=5.5A, Polarity=Standard, Pricing 1="1=0,34400, 10=0,23900, 100=0,12200, 500=0,10000 (USD)", Radiation Hardening=No, REACH SVHC="No SVHC", RoHS Compliant=Yes, Series=-, Stock 1=9, Supplier 1=Newark, Voltage Rating (DC)=30V, Weight=0.03g, Width=1.6mm
D103 D104: library part LEDGS-0805-450, "Led, Green, 520 Nm, 3.2 V, 30 Ma, 450 Mcd Rohs Compliant: Yes", Case Code (Imperial)=0805, Case Code (Metric)=2012, Color=Green, Forward Current=30mA, Forward Voltage=3.2V, Manufacturer 1="Wurth Electronics", Max Operating Temperature=85°C, Min Operating Temperature=-40°C, Package Quantity=4000, Supplier Part Number 1=8154221, Test Current=20mA, .Creator=GP, Case/Package=0805, Category=LEDs, ComponentLink1Description=Datasheet, ComponentLink1URL=https://www.we-online.com/catalog/datasheet/150080GS75000.pdf, ComponentLink2Description="Where buy it", ComponentLink2URL=https://katalog.we-online.de/en/led/WL-SMCW/150080GS75000, ComponentLink3Description=https://datasheet.ciiva.com/29563/150080gs75000-29563008.pdf?src-supplier=Digi-Key, ComponentLink3URL=https://datasheet.ciiva.com/29563/150080gs75000-29563008.pdf?src-supplier=Digi-Key, ComponentLink4Description=https://datasheet.ciiva.com/29279/759434-da-01-en-chipled-0805-w-kl-gruen-150080gs75000-29279039.pdf?src-supplier=Conrad, ComponentLink4URL=https://datasheet.ciiva.com/29279/759434-da-01-en-chipled-0805-w-kl-gruen-150080gs75000-29279039.pdf?src-supplier=Conrad, Dominant Wavelength=520nm, Height=0.7mm, Length=2mm, Lens Style=Clear,Rectangular, Luminous Intensity=450mcd, Manufacturer Part Number 1=150080GS75000, Mount="Surface Mount", Packaging="Cut Tape", Pricing 1="50=0,19300, 500=0,12900, 1000=0,12300, 2000=0,11700, 4000=0,11100 (USD)", REACH SVHC=Unknown, RoHS=Yes, RoHS Compliant=Yes, Stock 1=4350, Supplier 1=RSComponents, Viewing Angle=140°, Wavelength=520nm, Width=1.25mm
D105: library part LEDBS-1206-145, "Led, Blue, 470 Nm, 3.2 V, 30 Ma, 145 Mcd Rohs Compliant: Yes", Case Code (Imperial)=1206, Case Code (Metric)=3216, Color=Blue, Forward Current=30mA, Forward Voltage=3.2V, Manufacturer="Wurth Electronics", Max Operating Temperature=85°C, Min Operating Temperature=-40°C, Package Quantity=3000, Supplier Part Number 1=8154243, Test Current=20mA, .Creator=GP, Case/Package=1206, Category=LEDs, ComponentLink1Description=https://datasheet.ciiva.com/22656/150120bs75000-22656976.pdf?src-supplier=Element14, ComponentLink1URL=https://datasheet.ciiva.com/22656/150120bs75000-22656976.pdf?src-supplier=Element14, ComponentLink2Description=https://datasheet.ciiva.com/29279/759440-da-01-en-chipled-1206-w-kl-blau-150120bs75000-29279045.pdf?src-supplier=Conrad, ComponentLink2URL=https://datasheet.ciiva.com/29279/759440-da-01-en-chipled-1206-w-kl-blau-150120bs75000-29279045.pdf?src-supplier=Conrad, ComponentLink3Description=https://datasheet.ciiva.com/29561/150120bs75000-29561882.pdf?src-supplier=Digi-Key, ComponentLink3URL=https://datasheet.ciiva.com/29561/150120bs75000-29561882.pdf?src-supplier=Digi-Key, ComponentLink4Description="Where buy it", ComponentLink4URL=https://www.we-online.com/catalog/en/WL-SMCW?sq=150120BS75000#150120BS75000, Dominant Wavelength=470nm, Height=0.68mm, Length=3.2mm, Lens Style=Clear,Rectangular, Luminous Intensity=145mcd, Manufacturer part number=150120BS75000, Mount="Surface Mount", Packaging="Tape and Reel", Pricing 1="50=0,23200, 500=0,16400, 750=0,15500, 1500=0,15000, 3000=0,14200 (USD)", REACH SVHC=Unknown, RoHS=Yes, RoHS Compliant=Yes, Stock 1=1, Supplier 1=RSComponents, Viewing Angle=140°, Wavelength=470nm, Width=1.6mm
D106: library part DTVS-13V-DO-214AC, "Tvs Diode, 400W, 13V, Bidir, DO-214AC", Clamping Voltage=21.5V, Manufacturer="Wurth Electronics", Max Breakdown Voltage=15.15V, Max Operating Temperature=150°C, Min Operating Temperature=-65°C, Peak Pulse Current=18.6A, Peak Pulse Power=400W, Power Line Protection=No, Resistor Type=Zener, Reverse Standoff Voltage=13V, Supplier Part Number 1=732-824501131CT-ND, .Creator=DO, Category="TVS Diodes", ComponentLink1Description=https://katalog.we-online.de/pbs/datasheet/824501131.pdf?src-supplier=Digi-Key, ComponentLink1URL=https://katalog.we-online.de/pbs/datasheet/824501131.pdf?src-supplier=Digi-Key, ComponentLink2Description=http://www.farnell.com/datasheets/2036399.pdf?src-supplier=Element14, ComponentLink2URL=http://www.farnell.com/datasheets/2036399.pdf?src-supplier=Element14, ComponentLink3Description="Where buy it", ComponentLink3URL=https://www.we-online.com/catalog/en/WE-TVSP?sq=824501131#824501131, Manufacturer part number=824501131, Min Breakdown Voltage=15.15V, Mount="Surface Mount", Number of Bidirectional Channels=1, Number of Pins=2, Packaging="Cut Tape", Polarity=Bidirectional, Pricing 1="1=0,27000 (USD)", REACH SVHC=Unknown, RoHS=Yes, RoHS Compliant=Yes, Stock 1=1000, Supplier 1=Digi-Key
D201 D202: library part DTVS-6V-DO-214AC, "TVS diode [Würth Elektronik] 824501600 TVS diode", Clamping Voltage=10.3V, Manufacturer="Wurth Electronics", Max Breakdown Voltage=7.02V, Max Operating Temperature=150°C, Min Operating Temperature=-65°C, Peak Pulse Current=38.8A, Peak Pulse Power=400W, Power Line Protection=No, Resistor Type=Zener, Reverse Standoff Voltage=6V, Supplier Part Number 1=710-824501600, .Creator=DO, Category="TVS Diodes", ComponentLink1Description="Where buy it", ComponentLink1URL=https://www.we-online.com/catalog/en/WE-TVSP?sq=824501600#824501600, ComponentLink2Description=http://www.farnell.com/datasheets/2036401.pdf?src-supplier=Element14, ComponentLink2URL=http://www.farnell.com/datasheets/2036401.pdf?src-supplier=Element14, ComponentLink3Description=https://katalog.we-online.de/pbs/datasheet/824501600.pdf?src-supplier=Digi-Key, ComponentLink3URL=https://katalog.we-online.de/pbs/datasheet/824501600.pdf?src-supplier=Digi-Key, Manufacturer part number=824501600, Min Breakdown Voltage=7.02V, Mount="Surface Mount", Number of Bidirectional Channels=1, Number of Pins=2, Packaging="Cut Tape", Polarity=Bidirectional, Pricing 1="1=0,28000, 10=0,26100, 50=0,26100, 100=0,23400, 500=0,20400, 1000=0,17400, 10000=0,17400 (USD)", REACH SVHC=Unknown, RoHS=Yes, RoHS Compliant=Yes, Stock 1=780, Supplier 1=Mouser
D205 D206: library part LEDRS-0805-150, "0805(H=0.8mm) 红色 高亮 λD=625nm VF=2V IF=30mA PD=72mW", Case Code (Imperial)=0805, Case Code (Metric)=2012, Color=Red, Forward Current=30mA, Forward Voltage=2V, Manufacturer 1="Wurth Electronics", Max Operating Temperature=85°C, Min Operating Temperature=-40°C, Package Quantity=4000, Supplier Part Number 1=8154225P, Test Current=20mA, .Creator=DR, Case/Package=0805, Category=LEDs, ComponentLink1Description=Datasheet, ComponentLink1URL=https://www.we-online.com/catalog/datasheet/150080RS75000.pdf, ComponentLink2Description="Where buy it", ComponentLink2URL=https://katalog.we-online.de/en/led/WL-SMCW/150080RS75000, ComponentLink3Description=https://datasheet.ciiva.com/22656/150080rs75000-22656961.pdf?src-supplier=Element14, ComponentLink3URL=https://datasheet.ciiva.com/22656/150080rs75000-22656961.pdf?src-supplier=Element14, ComponentLink4Description=https://datasheet.ciiva.com/29279/759435-da-01-en-chipled-0805-w-kl-rot-150080rs75000-29279032.pdf?src-supplier=Conrad, ComponentLink4URL=https://datasheet.ciiva.com/29279/759435-da-01-en-chipled-0805-w-kl-rot-150080rs75000-29279032.pdf?src-supplier=Conrad, Dominant Wavelength=625nm, Height=0.7mm, Length=2mm, Lens Style=Clear,Rectangular, Luminous Intensity=150mcd, Manufacturer Part Number 1=150080RS75000, Mount="Surface Mount", Packaging="Tape and Reel", Pricing 1="50=0,19300, 500=0,12900, 1000=0,12300, 2000=0,11700, 4000=0,11100 (USD)", REACH SVHC=Unknown, RoHS=Yes, RoHS Compliant=Yes, Stock 1=1, Supplier 1=RSComponents, Viewing Angle=140°, Wavelength=625nm, Width=1.25mm
D301 D302: library part LEDYS-0805-120, "2 V Yellow LED 2012 (0805) SMD, Wurth Elektronik WL-SMCW 150080YS75000", Case Code (Imperial)=0805, Case Code (Metric)=2012, Color=Yellow, Forward Current=30mA, Forward Voltage=2V, Manufacturer 1="Wurth Electronics", Max Operating Temperature=85°C, Min Operating Temperature=-40°C, Package Quantity=4000, Supplier Part Number 1=8154231, Test Current=20mA, .Creator=DR, Case/Package=0805, Category=LEDs, ComponentLink1Description=Datasheet, ComponentLink1URL=https://www.we-online.com/catalog/datasheet/150080YS75000.pdf, ComponentLink2Description="Where buy it", ComponentLink2URL=https://katalog.we-online.de/en/led/WL-SMCW/150080YS75000, ComponentLink3Description=https://datasheet.ciiva.com/23843/150080ys75000-23843256.pdf?src-supplier=Newark, ComponentLink3URL=https://datasheet.ciiva.com/23843/150080ys75000-23843256.pdf?src-supplier=Newark, ComponentLink4Description=https://datasheet.ciiva.com/29279/759438-da-01-en-chipled-0805-w-kl-gelb-150080ys75000-29279034.pdf?src-supplier=Conrad, ComponentLink4URL=https://datasheet.ciiva.com/29279/759438-da-01-en-chipled-0805-w-kl-gelb-150080ys75000-29279034.pdf?src-supplier=Conrad, ComponentLink5Description=https://datasheet.ciiva.com/22656/1911353-22656971.pdf?src-supplier=Element14, ComponentLink5URL=https://datasheet.ciiva.com/22656/1911353-22656971.pdf?src-supplier=Element14, ComponentLink6Description=https://datasheet.ciiva.com/29563/150080ys75000-29563019.pdf?src-supplier=Digi-Key, ComponentLink6URL=https://datasheet.ciiva.com/29563/150080ys75000-29563019.pdf?src-supplier=Digi-Key, ComponentLink7Description=https://datasheet.ciiva.com/29563/150080ys75000-29563020.pdf?src-supplier=Digi-Key, ComponentLink7URL=https://datasheet.ciiva.com/29563/150080ys75000-29563020.pdf?src-supplier=Digi-Key, ComponentLink8Description=https://datasheet.ciiva.com/29563/150080ys75000-29563021.pdf?src-supplier=Digi-Key, ComponentLink8URL=https://datasheet.ciiva.com/29563/150080ys75000-29563021.pdf?src-supplier=Digi-Key, Dominant Wavelength=590nm, Height=0.7mm, Length=2mm, Lens Style=Clear,Rectangular, Luminous Intensity=120mcd, Manufacturer Part Number 1=150080YS75000, Mount="Surface Mount", Packaging="Tape and Reel", Pricing 1="50=0,19300, 500=0,12900, 750=0,12300, 1500=0,11700, 3000=0,11100 (USD)", REACH SVHC=Unknown, RoHS=Yes, RoHS Compliant=Yes, Stock 1=2100, Supplier 1=RSComponents, Viewing Angle=140°, Wavelength=590nm, Width=1.25mm
DCDC101: library part DCDC-42V/5V-1A, "Würth Elektronik 8-42V to 5V 1A DC-DC", Manufacturer 1="Wurth Electronics", Max Input Voltage=42V, Max Operating Temperature=85°C, Max Output Current=1A, Min Input Voltage=8V, Min Operating Temperature=-40°C, Supplier Part Number 1=1447809, Voltage - Output 1=5V, .Creator=DR, ComponentLink1Description=http://www.farnell.com/datasheets/2192895.pdf?src-supplier=Farnell, ComponentLink1URL=http://www.farnell.com/datasheets/2192895.pdf?src-supplier=Farnell, ComponentLink2Description=http://www.farnell.com/datasheets/2192895.pdf?src-supplier=Newark, ComponentLink2URL=http://www.farnell.com/datasheets/2192895.pdf?src-supplier=Newark, ComponentLink3Description=https://katalog.we-online.de/pm/datasheet/173010542.pdf?src-supplier=Digi-Key, ComponentLink3URL=https://katalog.we-online.de/pm/datasheet/173010542.pdf?src-supplier=Digi-Key, Efficiency=93%, Features=UVLO,OCP,OTP,SCP, Manufacturer Part Number 1=173010542, Mount="Through Hole", Number of Outputs=1, Packaging=Rail/Tube, Pricing 1="1=12,22500, 8=10,96900, 21=10,68900 (USD)", RoHS=Yes, RoHS Compliant=Yes, Stock 1=1, Supplier 1=RSComponents
F101 F102: library part Fuse_1A_63V_1206, "Fuse Chip Fast Acting 1A 63V SMD Solder Pad 1206 Ceramic T/R Automotive", Case Code (Imperial)=1206, Case Code (Metric)=3216, Current Rating=1A, Manufacturer=Littelfuse, Max Operating Temperature=150°C, Min Operating Temperature=-55°C, Supplier Part Number 1=F10001CT-ND, Voltage Rating (AC)=63V, .Creator=DO, Approvals=CSA,cURus, Case/Package=1206, Category=Fuses, ComponentLink1Description=https://www.littelfuse.com/~/media/electronics/datasheets/fuses/littelfuse_fuse_437a_datasheet.pdf.pdf?src-supplier=Digi-Key, ComponentLink1URL=https://www.littelfuse.com/~/media/electronics/datasheets/fuses/littelfuse_fuse_437a_datasheet.pdf.pdf?src-supplier=Digi-Key, ComponentLink2Description="Where buy it", ComponentLink2URL=https://www.mouser.es/ProductDetail/Littelfuse/0437001WRA?qs=DXv0QSHKF4z9CJhPXjxR%252BA%3D%3D, Fuse Type="Board Mount (Cartridge Style Excluded)", Manufacturer part number=0437001.WRA, Mount="Surface Mount", Packaging="Tape and Reel", Pricing 1="1=1,52000, 5=1,47000, 10=1,37600, 50=1,13860, 100=0,94880, 250=0,92508, 500=0,78276, 1000=0,68788 (USD)", RoHS=Yes, Stock 1=5820, Supplier 1=Digi-Key, Voltage Rating (DC)=63V
J1: library part J_MicroFit_2x3_V, "Micro fit Header, 2 Row, Vertical, Polarizing Peg, 6 Pin, Tin Plate, SMT/Glow Wire, Kinked Leads", Manufacturer=Molex, Manufacturer part number=43045-0612, Supplier Part Number 1=2332898, .Creator=DO, Category="Headers and Wire Housings", ComponentLink1Description=Datasheet, ComponentLink1URL=https://www.molex.com/pdm_docs/sd/430450612_sd.pdf, ComponentLink2Description=https://datasheet.ciiva.com/11748/0900766b800bd7d2-11748707.pdf?src-supplier=RSComponents, ComponentLink2URL=https://datasheet.ciiva.com/11748/0900766b800bd7d2-11748707.pdf?src-supplier=RSComponents, ComponentLink3Description=https://datasheet.ciiva.com/19462/883464-19462371.pdf?src-supplier=Jameco, ComponentLink3URL=https://datasheet.ciiva.com/19462/883464-19462371.pdf?src-supplier=Jameco, ComponentLink4Description=https://datasheet.ciiva.com/30194/128550430450612-pcb-headers-30194512.pdf?src-supplier=Onlinecomponents.com, ComponentLink4URL=https://datasheet.ciiva.com/30194/128550430450612-pcb-headers-30194512.pdf?src-supplier=Onlinecomponents.com, ComponentLink5Description=https://datasheet.ciiva.com/9468/0430450612-pcb-headers-9468492.pdf?src-supplier=Avnet, ComponentLink5URL=https://datasheet.ciiva.com/9468/0430450612-pcb-headers-9468492.pdf?src-supplier=Avnet, ComponentLink8Description="Where buy it", ComponentLink8URL=https://www.molex.com/molex/products/part-detail/pcb_headers/0430450612, Pricing 1="5=1,45500, 100=1,26700, 375=1,08900, 1500=0,90900, 3000=0,72900 (USD)", RoHS=Yes, Stock 1=2635, Supplier 1=RSComponents
J2: "WR-COM Micro USB 2.0 SMT Type B Horizontal 5 Contacts", Manufacturer="Wurth Elektronik", Operating Temperature Max=105°C, Operating Temperature Min=-40°C, Rated Current=1A, Working Voltage="30V (AC)", Application="Micro USB 2.0", Category="Input/Output Connectors", ComponentLink1Description="Website Link", ComponentLink1URL=https://www.we-online.com/redexpert/article/629105136821?ad, ComponentLink2Description="Datasheet Link", ComponentLink2URL=https://www.we-online.com/redexpert/spec/629105136821?ad, Gender=Receptacle, Interface Type="Type B", Manufacturer part number=629105136821, Match Code=WR-USB, Mount="Surface Mount", Number of Pins=5, Number of Ports=1, Orientation=Horizontal, Packaging="Tape and Reel"
J4 J5 J6 J7: "WR-PHD Pin Header, SMT, Vertical, pitch 1.27mm, 2 Row, 28P", Contact Resistance=20mΩ, Manufacturer="Wurth Elektronik", Operating Temperature Max=105°C, Operating Temperature Min=-40°C, Rated Current=1A, Withstanding Voltage=500V, Working Voltage=100V, Category="Board-to-Board Connectors", ComponentLink1Description="Website Link", ComponentLink1URL=https://www.we-online.com/redexpert/article/62132821021?ad, ComponentLink2Description="Datasheet Link", ComponentLink2URL=https://www.we-online.com/redexpert/spec/62132821021?ad, Gender="Pin Header", Manufacturer part number=62132821021, Match Code=WR-PHD, Mount="Surface Mount", Number of Pins=28, Number of Rows=2, Orientation=Vertical, Packaging="Tape and Reel", Pitch=1.27mm
J8: library part J_Jumper, "CONN HEADER 2 POS 2.54", Color=Black, Current Rating=3A, Manufacturer=Molex, Max Operating Temperature=125°C, Maximum current="3 A", Maximum voltage="250 V AC", Min Operating Temperature=-40°C, Supplier Part Number 1=8281581, Temperature rating="-40° to +105°C", Voltage Rating=250V, .Creator=GP, Application=Shortcircuit, Category=Connector, Category type=PCB-PCB, ComponentLink1Description=Datasheet, ComponentLink1URL=https://www.we-online.com/catalog/datasheet/61300211121.pdf, ComponentLink2Description="Where buy it", ComponentLink2URL=https://www.we-online.com/catalog/en/PHD_2_54_THT_PIN_HEADER_6130XX11121?sq=61300211121&sp=https%3A%2F%2Fwww.we-online.com%2Fweb%2Fen%2Fwuerth_elektronik%2Fsearchpage.php%3Fsearch%3D61300211121#61300211121, ComponentLink3Description=https://datasheet.ciiva.com/13619/6130xx11121-48870-13619345.pdf?src-supplier=Mouser, ComponentLink3URL=https://datasheet.ciiva.com/13619/6130xx11121-48870-13619345.pdf?src-supplier=Mouser, Connections=1x2, Connector Type="Male Pin", Contact Gender=Male, Contact Material="Copper Alloy,Copper", Contact Mating Length=0.236inch, Contact Plating=Gold, Flammability=94V-0, Gender=Male, Housing Material=PBT, Lead Free="Lead Free", Manufacturer part number=61300211121, Mount="Through hole", Number of Contacts=2, Number of Positions=2, Number of Rows=1, Orientation=Vertical, Packaging=Bulk, Pitch=0.1inch, Pricing 1="5=0,14100, 50=0,09700, 100=0,07800, 200=0,07300, 500=0,06800 (USD)", Product name="Pin Header", REACH SVHC=Unknown, Stock 1=1855, Supplier="Würth Elektronik", Supplier 1=RSComponents, Termination="Through Hole"
J101: library part J_Jumper3
L101 L102: library part L_47u-490mA_CF, "Inductor Power Unshielded Wirewound 47uH 10% 100KHz Ferrite 490mA 546mOhm DCR T/R", Case/Package=Nonstandard, Current Rating=490mA, DC Resistance (DCR)=546mR, Manufacturer=Sumida, Manufacturer part number=CDC5D23BNP-470KC, Max Operating Temperature=100°C, Min Operating Temperature=-40°C, Package Quantity=2000, Supplier Part Number 1=851-CDC5D23BNP-470KC, Test Frequency=100kHz, Tolerance=10%, .Creator=GP, Category="Fixed Inductors", ComponentLink1Description=http://www.mouser.com/ds/2/390/CDC5D23B-465898.pdf?src-supplier=Mouser, ComponentLink1URL=http://www.mouser.com/ds/2/390/CDC5D23B-465898.pdf?src-supplier=Mouser, ComponentLink3Description=http://products.sumida.com/products/pdf/CDC5D23B.pdf?src-supplier=Digi-Key, ComponentLink3URL=http://products.sumida.com/products/pdf/CDC5D23B.pdf?src-supplier=Digi-Key, Core Material=Ferrite, Height=2.5mm, Height - Seated (Max)=0.098inch, Inductance=47uH, Lead Free="Lead Free", Length=0.228inch, Max DC Current=490mA, Mount="Surface Mount", Packaging="Tape and Reel", Pricing 1="1=0,95000, 10=0,71100, 50=0,71100, 100=0,59700, 1000=0,40600, 10000=0,38100 (USD)", RoHS=Yes, RoHS Compliant=Yes, Series=CDC5D23B, Shielding=Unshielded, Stock 1=3779, Supplier 1=Mouser, Termination=SMD/SMT, Weight=0.007584oz, Width=5.8mm